# Altium PCB EPS_V1.PcbDoc
Units mil, origin at the board's own origin, x right, y up, seen from the top; angles counter-clockwise.
Board outline 3550 x 3775.2 mil, 2 copper layers (Top Layer, Bottom Layer), stack 61.756 mil thick; 16 components, 104 nets, 899 pads, 35 vias.
Unrouted connection lines stored in the file: 22.
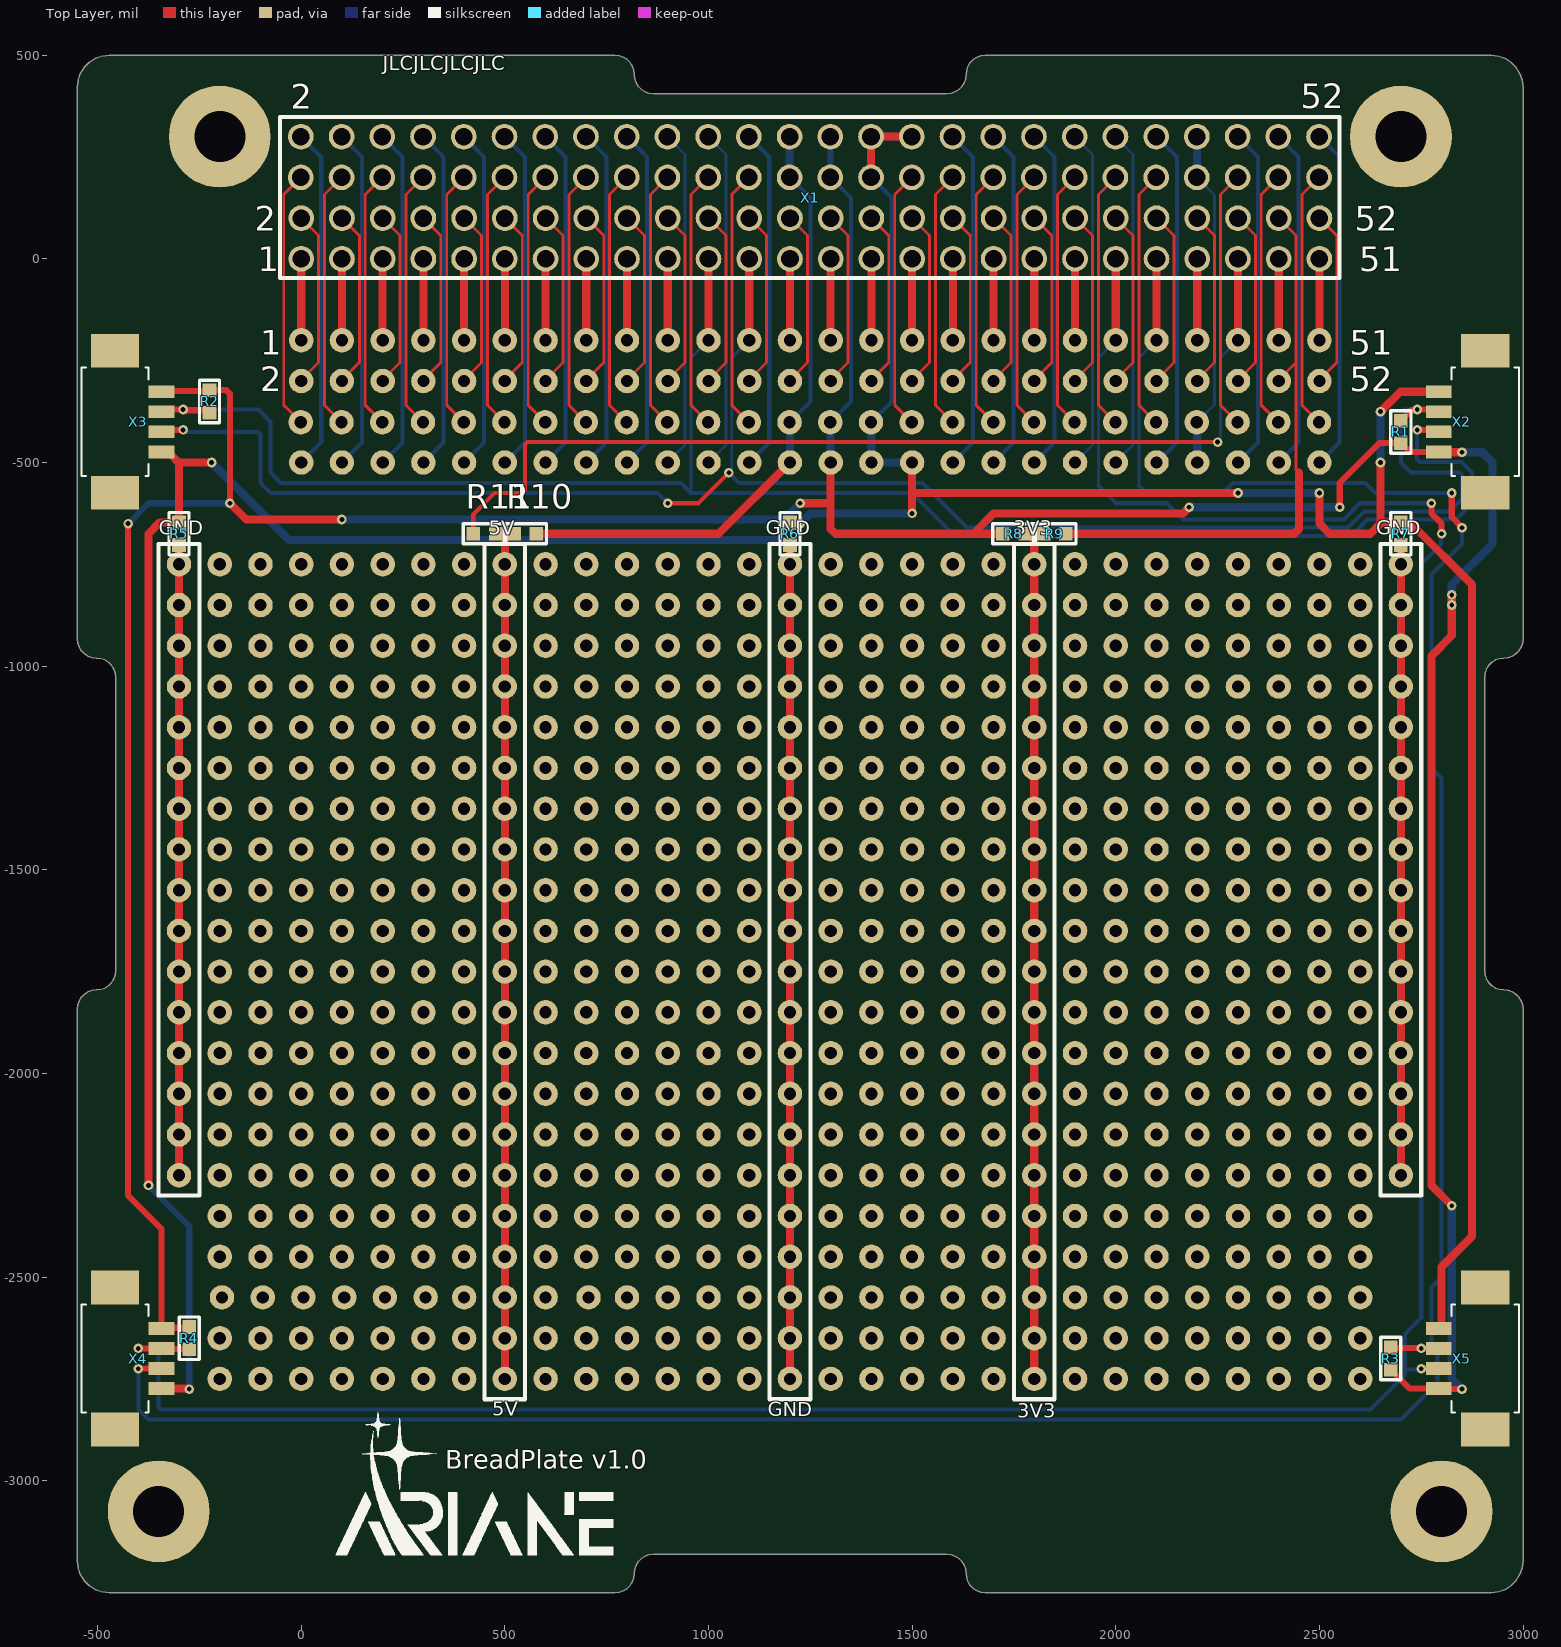
[diagram p0: Top Layer view]
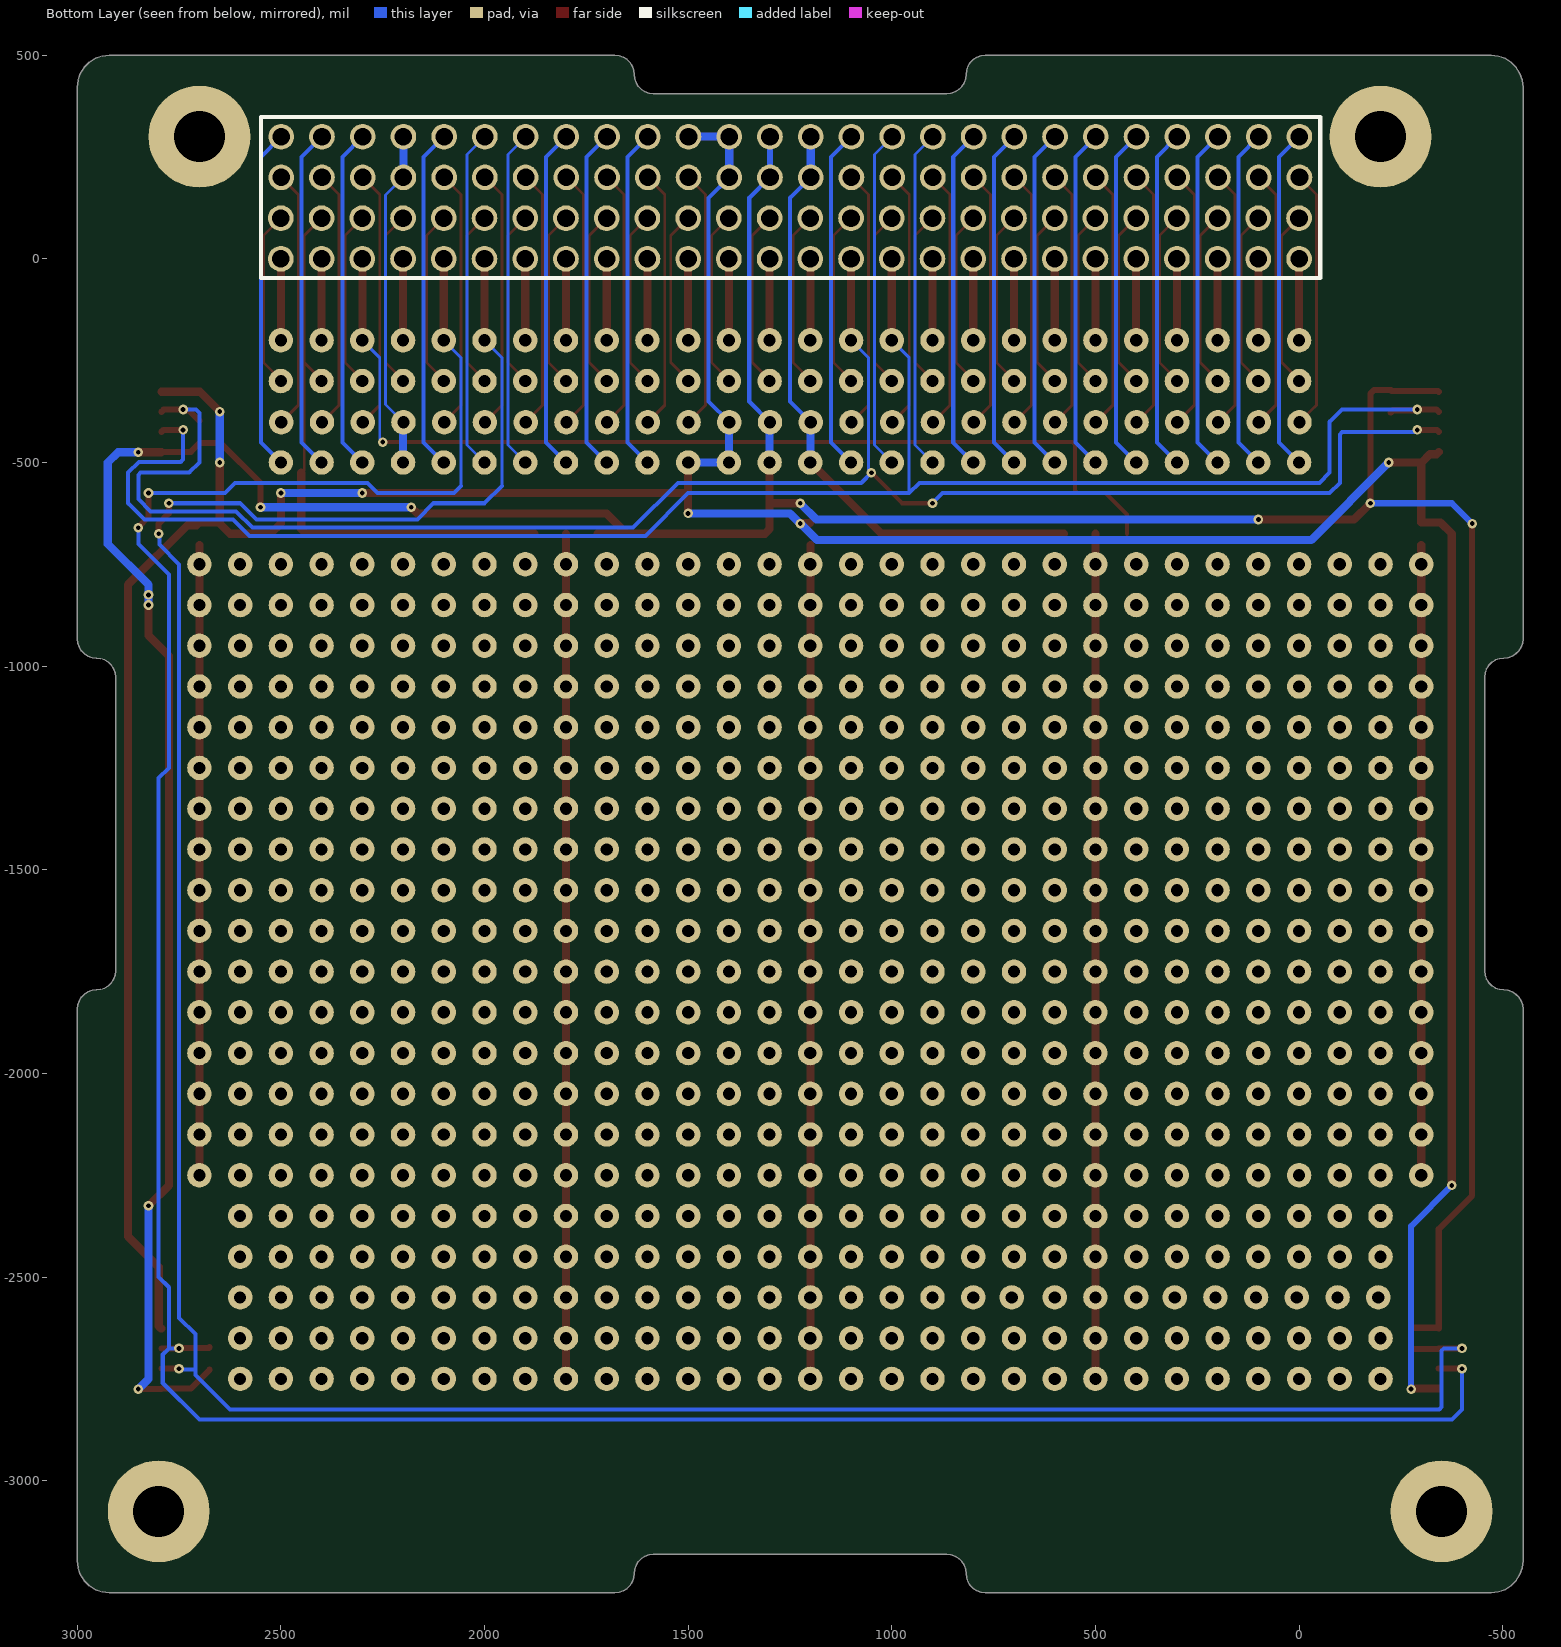
[diagram p1: Bottom Layer view, seen from below]

## Layer stack, top to bottom
Top Solder: solder mask 1, SM-001, Dk 4
Top Layer: signal copper 1.378
Dielectric 1: core 59, Core-043, Dk 4.3
Bottom Layer: signal copper 1.378
Bottom Solder: solder mask 1, SM-001, Dk 4

## Board outline
-549.96,-3196.44 -547.99,-3213.96 -542.17,-3230.6 -532.78,-3245.53 -520.32,-3258 -505.39,-3267.38 -488.74,-3273.21 -471.22,-3275.18 770.31,-3275.18 780.83,-3274 790.81,-3270.5 799.77,-3264.87 807.25,-3257.39 812.88,-3248.43 816.37,-3238.45 817.56,-3227.94 818.74,-3217.42 822.24,-3207.44 827.86,-3198.48 835.34,-3191 844.3,-3185.37 854.29,-3181.88 864.8,-3180.69 1585.27,-3180.69 1595.79,-3181.88 1605.77,-3185.37 1614.73,-3191 1622.21,-3198.48 1627.84,-3207.44 1631.33,-3217.42 1632.52,-3227.94 1633.7,-3238.45 1637.2,-3248.43 1642.82,-3257.39 1650.31,-3264.87 1659.26,-3270.5 1669.25,-3274 1679.76,-3275.18 2921.3,-3275.18 2938.82,-3273.21 2955.46,-3267.38 2970.39,-3258 2982.86,-3245.53 2992.24,-3230.6 2998.06,-3213.96 3000.04,-3196.44 3000.04,-1842.31 2998.85,-1831.79 2995.36,-1821.81 2989.73,-1812.85 2982.25,-1805.37 2973.29,-1799.74 2963.31,-1796.25 2952.79,-1795.06 2942.28,-1793.88 2932.29,-1790.38 2923.34,-1784.76 2915.86,-1777.27 2910.23,-1768.32 2906.73,-1758.33 2905.55,-1747.82 2905.55,-1027.35 2906.73,-1016.83 2910.23,-1006.85 2915.86,-997.89 2923.34,-990.41 2932.29,-984.78 2942.28,-981.29 2952.79,-980.1 2963.31,-978.92 2973.29,-975.42 2982.25,-969.79 2989.73,-962.31 2995.36,-953.36 2998.85,-943.37 3000.04,-932.86 3000.04,421.28 2998.06,438.8 2992.24,455.44 2982.86,470.37 2970.39,482.84 2955.46,492.22 2938.82,498.04 2921.3,500.02 1679.76,500.02 1669.25,498.83 1659.26,495.34 1650.31,489.71 1642.82,482.23 1637.2,473.27 1633.7,463.29 1632.52,452.77 1631.33,442.26 1627.84,432.27 1622.21,423.32 1614.73,415.84 1605.77,410.21 1595.79,406.71 1585.27,405.53 864.8,405.53 854.29,406.71 844.3,410.21 835.34,415.84 827.86,423.32 822.24,432.27 818.74,442.26 817.56,452.77 816.37,463.29 812.88,473.27 807.25,482.23 799.77,489.71 790.81,495.34 780.83,498.83 770.31,500.02 -471.22,500.02 -488.74,498.04 -505.39,492.22 -520.32,482.84 -532.78,470.37 -542.17,455.44 -547.99,438.8 -549.96,421.28 -549.96,-932.86 -548.78,-943.37 -545.28,-953.36 -539.66,-962.31 -532.17,-969.79 -523.22,-975.42 -513.23,-978.92 -502.72,-980.1 -492.21,-981.29 -482.22,-984.78 -473.26,-990.41 -465.78,-997.89 -460.15,-1006.85 -456.66,-1016.83 -455.47,-1027.35 -455.47,-1747.82 -456.66,-1758.33 -460.15,-1768.32 -465.78,-1777.27 -473.26,-1784.76 -482.22,-1790.38 -492.21,-1793.88 -502.72,-1795.06 -513.23,-1796.25 -523.22,-1799.74 -532.17,-1805.37 -539.66,-1812.85 -545.28,-1821.81 -548.78,-1831.79 -549.96,-1842.31

## Design rules (kind name [scope] priority, off if disabled: settings)
BoardOutlineClearance [All] p1: gap=11.81 ignorepadtopadclearanceinfootprint=FALSE
Clearance [All] p1: gap=5 ignorepadtopadclearanceinfootprint=FALSE
ComponentClearance [All] p1: gap=19.68 collisioncheckmode=3 verticalgap=19.68 showdistances=FALSE
DiffPairsRouting [All] p1: maxlimit=11.81 minlimit=3.94 mostfreqgap=5.91 toplayer_minwidth=3.94 toplayer_maxwidth=11.81 toplayer_prefwidth=5.91 bottomlayer_minwidth=3.94 bottomlayer_maxwidth=11.81 bottomlayer_prefwidth=5.91 maxuncoupledlength=500
Height [All] p1: minheight=0 maxheight=1968.5 prefheight=500
HoleSize [All] p1: absolutevalues=TRUE maxlimit=393.7 minlimit=7.87 maxpercent=80.000 minpercent=20.000
HoleToHoleClearance [All] p1: gap=7.87 allowstackedmicrovias=TRUE
MinimumSolderMaskSliver [All] p1: minsoldermaskwidth=7.87
PlaneClearance [All] p1: clearance=19.68
PlaneConnect [All] p1: planeconnectstyle=Direct reliefexpansion=19.68 reliefentries=4 reliefconductorwidth=7.87 reliefairgap=7.87
PolygonConnect [All] p1: connectstyle=Direct reliefconductorwidth=7.87 reliefentries=4 polygonreliefangle="90 Angle" airgapwidth=7.87
RoutingVias [All] p1: holewidth=7.87 width=17.72 viastyle="Through Hole" minholewidth=7.87 minwidth=17.72 maxholewidth=98.43 maxwidth=196.85
SilkToSolderMaskClearance [IsPad] p1: minsilkscreentomaskgap=7.87 clearancetoexposedcopper=TRUE
SolderMaskExpansion [All] p1: expansion=2.95 istentingtop=FALSE
Width [All] p1: maxlimit=100 minlimit=3.5 preferedwidth=5
21 further rules are at their usual default settings.

## Components (designator, comment, footprint, x,y, rotation, side; value= is the part's Value field where it differs from the comment)
R1 "RES 0603 *" "RES 0603" 2700,-425 r270 top
R2 "RES 0603 *" "RES 0603" -225,-350 r270 top
R3 "RES 0603 *" "RES 0603" 2675,-2700 r90 top
R4 "RES 0603 *" "RES 0603" -275,-2650 r270 top
R5 "RES 0603 0" "RES 0603" -300,-675 r270 top value=0
R6 "RES 0603 0" "RES 0603" 1200,-675 r270 top value=0
R7 "RES 0603 0" "RES 0603" 2700,-675 r270 top value=0
R8 "RES 0603 0" "RES 0603" 1750,-675 r0 top value=0
R9 "RES 0603 0" "RES 0603" 1850,-675 r180 top value=0
R10 "RES 0603 0" "RES 0603" 550,-675 r180 top value=0
R11 "RES 0603 0" "RES 0603" 450,-675 r0 top value=0
X1 "PC104" PC104_ArianSpace -199.96,300.02 r0 top
X2 "Header?" PicoBlade_4P 2850,-400 r90 top
X3 "Header?" PicoBlade_4P -400,-400 r270 top
X4 "Header?" PicoBlade_4P -400,-2700 r270 top
X5 "Header?" PicoBlade_4P 2850,-2700 r90 top

## Footprints (in the part's own frame and the unit in brackets; to place one, negate y for a bottom-side part, rotate by r counter-clockwise, add the part's x,y. Pads: shape width x height; smd on the part's side, far side on the other; paste and mask are expansions set on the pad)
PC104_ArianSpace [mm]
  round 1.6 hole 1.1 mask+0: 1(5.079,-7.62) 2(5.08,-5.08) 3(7.619,-7.62) 4(7.62,-5.08) 5(10.159,-7.62) 6(10.16,-5.08) 7(12.699,-7.62) 8(12.7,-5.08) 9(15.239,-7.62) 10(15.24,-5.08) 11(17.779,-7.62) 12(17.78,-5.08) 13(20.319,-7.62) 14(20.32,-5.08) 15(22.859,-7.62) 16(22.86,-5.08) 17(25.399,-7.62) 18(25.4,-5.08) 19(27.939,-7.62) 20(27.94,-5.08) 21(30.479,-7.62) 22(30.48,-5.08) 23(33.019,-7.62) 24(33.02,-5.08) 25(35.559,-7.62) 26(35.56,-5.08) 27(38.099,-7.62) 28(38.1,-5.08) 29(40.639,-7.62) 30(40.64,-5.08) 31(43.179,-7.62) 32(43.18,-5.08) 33(45.719,-7.62) 34(45.72,-5.08) 35(48.259,-7.62) 36(48.26,-5.08) 37(50.799,-7.62) 38(50.8,-5.08) 39(53.339,-7.62) 40(53.34,-5.08) 41(55.879,-7.62) 42(55.88,-5.08) 43(58.419,-7.62) 44(58.42,-5.08) 45(60.959,-7.62) 46(60.96,-5.08) 47(63.499,-7.62) 48(63.5,-5.08) 49(66.039,-7.62) 50(66.04,-5.08) 51(68.579,-7.62) 52(68.58,-5.08) 53(5.057,-2.54) 54(5.058,0) 55(7.597,-2.54) 56(7.598,0) 57(10.137,-2.54) 58(10.138,0) 59(12.677,-2.54) 60(12.678,0) 61(15.217,-2.54) 62(15.218,0) 63(17.757,-2.54) 64(17.758,0) 65(20.297,-2.54) 66(20.298,0) 67(22.837,-2.54) 68(22.838,0) 69(25.377,-2.54) 70(25.378,0) 71(27.917,-2.54) 72(27.918,0) 73(30.457,-2.54) 74(30.458,0) 75(32.997,-2.54) 76(32.998,0) 77(35.537,-2.54) 78(35.538,0) 79(38.077,-2.54) 80(38.078,0) 81(40.617,-2.54) 82(40.618,0) 83(43.157,-2.54) 84(43.158,0) 85(45.697,-2.54) 86(45.698,0) 87(48.237,-2.54) 88(48.238,0) 89(50.777,-2.54) 90(50.778,0) 91(53.317,-2.54) 92(53.318,0) 93(55.857,-2.54) 94(55.858,0) 95(58.397,-2.54) 96(58.398,0) 97(60.937,-2.54) 98(60.938,0) 99(63.477,-2.54) 100(63.478,0) 101(66.017,-2.54) 102(66.018,0) 103(68.557,-2.54) 104(68.558,0)
  silkscreen extent 3.76,-8.81 69.82,1.22, body extent 3.76,-8.84 69.8,1.32, height 11.68
PicoBlade_4P [mm]
  rect 0.8x1.6 smd: 1(-1.875,1.45) 2(-0.625,1.45) 3(0.625,1.45) 4(1.875,1.45)
  rect 2.1x3 smd: S1(-4.425,-1.45) S2(4.425,-1.45)
  silkscreen extent -3.37,-3.55 3.38,0.65, body extent -5.04,-2.46 5.11,1.74, height 4.77
"RES 0603" [mm]
  rect 0.85x0.85 smd: 1(-0.7,0) 2(0.7,0)
  silkscreen extent -1.33,-0.63 1.33,0.63, body extent -0.8,-0.4 0.8,0.4, height 0.44

## Part data
R1 R2 R3 R4 R5 R6 R7 R8 R9 R10 R11: library part !Resistor, "Resistor", IsSMT=NoSMT
X1: library part PC104_ArianSpace, "PC104 connector"
X2 X3 X4 X5: library part "Header 1x4", "4x1 header", IsSMT=NoSMT, Purpose="I2C Header"

## Free pads (board coordinates)
  round 250 hole 125.2: 1(-349.96,-3075.18) 1(-199.96,300.02) 1(2700.04,300.02) 1(2800.04,-3075.18)
  round 60 hole 30: 2(-300,-2250) 2(-300,-2150) 2(-300,-2050) 2(-300,-1950) 2(-300,-1850) 2(-300,-1750) 2(-300,-1650) 2(-300,-1550) 2(-300,-1450) 2(-300,-1350) 2(-300,-1250) 2(-300,-1150) 2(-300,-1050) 2(-300,-950) 2(-300,-850) 2(-300,-750) 2(-200,-2750) 2(-200,-2650) 2(-200,-2450) 2(-200,-2350) 2(-200,-2250) 2(-200,-2150) 2(-200,-2050) 2(-200,-1950) 2(-200,-1850) 2(-200,-1750) 2(-200,-1650) 2(-200,-1550) 2(-200,-1450) 2(-200,-1350) 2(-200,-1250) 2(-200,-1150) 2(-200,-1050) 2(-200,-950) 2(-200,-850) 2(-200,-750) 2(-194.52,-2550) 2(-100,-2750) 2(-100,-2650) 2(-100,-2450) 2(-100,-2350) 2(-100,-2250) 2(-100,-2150) 2(-100,-2050) 2(-100,-1950) 2(-100,-1850) 2(-100,-1750) 2(-100,-1650) 2(-100,-1550) 2(-100,-1450) 2(-100,-1350) 2(-100,-1250) 2(-100,-1150) 2(-100,-1050) 2(-100,-950) 2(-100,-850) 2(-100,-750) 2(-94.52,-2550) 2(0,-2750) 2(0,-2650) 2(0,-2450) 2(0,-2350) 2(0,-2250) 2(0,-2150) 2(0,-2050) 2(0,-1950) 2(0,-1850) 2(0,-1750) 2(0,-1650) 2(0,-1550) 2(0,-1450) 2(0,-1350) 2(0,-1250) 2(0,-1150) 2(0,-1050) 2(0,-950) 2(0,-850) 2(0,-750) 2(5.48,-2550) 2(100,-2750) 2(100,-2650) 2(100,-2450) 2(100,-2350) 2(100,-2250) 2(100,-2150) 2(100,-2050) 2(100,-1950) 2(100,-1850) 2(100,-1750) 2(100,-1650) 2(100,-1550) 2(100,-1450) 2(100,-1350) 2(100,-1250) 2(100,-1150) 2(100,-1050) 2(100,-950) 2(100,-850) 2(100,-750) 2(105.48,-2550) 2(200,-2750) 2(200,-2650) 2(200,-2450) 2(200,-2350) 2(200,-2250) 2(200,-2150) 2(200,-2050) 2(200,-1950) 2(200,-1850) 2(200,-1750) 2(200,-1650) 2(200,-1550) 2(200,-1450) 2(200,-1350) 2(200,-1250) 2(200,-1150) 2(200,-1050) 2(200,-950) 2(200,-850) 2(200,-750) 2(205.48,-2550) 2(300,-2750) 2(300,-2650) 2(300,-2450) 2(300,-2350) 2(300,-2250) 2(300,-2150) 2(300,-2050) 2(300,-1950) 2(300,-1850) 2(300,-1750) 2(300,-1650) 2(300,-1550) 2(300,-1450) 2(300,-1350) 2(300,-1250) 2(300,-1150) 2(300,-1050) 2(300,-950) 2(300,-850) 2(300,-750) 2(305.48,-2550) 2(400,-2750) 2(400,-2650) 2(400,-2550) 2(400,-2450) 2(400,-2350) 2(400,-2250) 2(400,-2150) 2(400,-2050) 2(400,-1950) 2(400,-1850) 2(400,-1750) 2(400,-1650) 2(400,-1550) 2(400,-1450) 2(400,-1350) 2(400,-1250) 2(400,-1150) 2(400,-1050) 2(400,-950) 2(400,-850) 2(400,-750) 2(500,-2750) 2(500,-2650) 2(500,-2550) 2(500,-2450) 2(500,-2350) 2(500,-2250) 2(500,-2150) 2(500,-2050) 2(500,-1950) 2(500,-1850) 2(500,-1750) 2(500,-1650) 2(500,-1550) 2(500,-1450) 2(500,-1350) 2(500,-1250) 2(500,-1150) 2(500,-1050) 2(500,-950) 2(500,-850) 2(500,-750) 2(600,-2750) 2(600,-2650) 2(600,-2550) 2(600,-2450) 2(600,-2350) 2(600,-2250) 2(600,-2150) 2(600,-2050) 2(600,-1950) 2(600,-1850) 2(600,-1750) 2(600,-1650) 2(600,-1550) 2(600,-1450) 2(600,-1350) 2(600,-1250) 2(600,-1150) 2(600,-1050) 2(600,-950) 2(600,-850) 2(600,-750) 2(700,-2750) 2(700,-2650) 2(700,-2450) 2(700,-2350) 2(700,-2250) 2(700,-2150) 2(700,-2050) 2(700,-1950) 2(700,-1850) 2(700,-1750) 2(700,-1650) 2(700,-1550) 2(700,-1450) 2(700,-1350) 2(700,-1250) 2(700,-1150) 2(700,-1050) 2(700,-950) 2(700,-850) 2(700,-750) 2(705.48,-2550) 2(800,-2750) 2(800,-2650) 2(800,-2550) 2(800,-2450) 2(800,-2350) 2(800,-2250) 2(800,-2150) 2(800,-2050) 2(800,-1950) 2(800,-1850) 2(800,-1750) 2(800,-1650) 2(800,-1550) 2(800,-1450) 2(800,-1350) 2(800,-1250) 2(800,-1150) 2(800,-1050) 2(800,-950) 2(800,-850) 2(800,-750) 2(900,-2750) 2(900,-2650) 2(900,-2550) 2(900,-2450) 2(900,-2350) 2(900,-2250) 2(900,-2150) 2(900,-2050) 2(900,-1950) 2(900,-1850) 2(900,-1750) 2(900,-1650) 2(900,-1550) 2(900,-1450) 2(900,-1350) 2(900,-1250) 2(900,-1150) 2(900,-1050) 2(900,-950) 2(900,-850) 2(900,-750) 2(1000,-2750) 2(1000,-2650) 2(1000,-2550) 2(1000,-2450) 2(1000,-2350) 2(1000,-2250) 2(1000,-2150) 2(1000,-2050) 2(1000,-1950) 2(1000,-1850) 2(1000,-1750) 2(1000,-1650) 2(1000,-1550) 2(1000,-1450) 2(1000,-1350) 2(1000,-1250) 2(1000,-1150) 2(1000,-1050) 2(1000,-950) 2(1000,-850) 2(1000,-750) 2(1100,-2750) 2(1100,-2650) 2(1100,-2550) 2(1100,-2450) 2(1100,-2350) 2(1100,-2250) 2(1100,-2150) 2(1100,-2050) 2(1100,-1950) 2(1100,-1850) 2(1100,-1750) 2(1100,-1650) 2(1100,-1550) 2(1100,-1450) 2(1100,-1350) 2(1100,-1250) 2(1100,-1150) 2(1100,-1050) 2(1100,-950) 2(1100,-850) 2(1100,-750) 2(1200,-2750) 2(1200,-2650) 2(1200,-2550) 2(1200,-2450) 2(1200,-2350) 2(1200,-2250) 2(1200,-2150) 2(1200,-2050) 2(1200,-1950) 2(1200,-1850) 2(1200,-1750) 2(1200,-1650) 2(1200,-1550) 2(1200,-1450) 2(1200,-1350) 2(1200,-1250) 2(1200,-1150) 2(1200,-1050) 2(1200,-950) 2(1200,-850) 2(1200,-750) 2(1300,-2750) 2(1300,-2650) 2(1300,-2550) 2(1300,-2450) 2(1300,-2350) 2(1300,-2250) 2(1300,-2150) 2(1300,-2050) 2(1300,-1950) 2(1300,-1850) 2(1300,-1750) 2(1300,-1650) 2(1300,-1550) 2(1300,-1450) 2(1300,-1350) 2(1300,-1250) 2(1300,-1150) 2(1300,-1050) 2(1300,-950) 2(1300,-850) 2(1300,-750) 2(1400,-2750) 2(1400,-2650) 2(1400,-2550) 2(1400,-2450) 2(1400,-2350) 2(1400,-2250) 2(1400,-2150) 2(1400,-2050) 2(1400,-1950) 2(1400,-1850) 2(1400,-1750) 2(1400,-1650) 2(1400,-1550) 2(1400,-1450) 2(1400,-1350) 2(1400,-1250) 2(1400,-1150) 2(1400,-1050) 2(1400,-950) 2(1400,-850) 2(1400,-750) 2(1500,-2750) 2(1500,-2650) 2(1500,-2550) 2(1500,-2450) 2(1500,-2350) 2(1500,-2250) 2(1500,-2150) 2(1500,-2050) 2(1500,-1950) 2(1500,-1850) 2(1500,-1750) 2(1500,-1650) 2(1500,-1550) 2(1500,-1450) 2(1500,-1350) 2(1500,-1250) 2(1500,-1150) 2(1500,-1050) 2(1500,-950) 2(1500,-850) 2(1500,-750) 2(1600,-2750) 2(1600,-2650) 2(1600,-2550) 2(1600,-2450) 2(1600,-2350) 2(1600,-2250) 2(1600,-2150) 2(1600,-2050) 2(1600,-1950) 2(1600,-1850) 2(1600,-1750) 2(1600,-1650) 2(1600,-1550) 2(1600,-1450) 2(1600,-1350) 2(1600,-1250) 2(1600,-1150) 2(1600,-1050) 2(1600,-950) 2(1600,-850) 2(1600,-750) 2(1700,-2750) 2(1700,-2650) 2(1700,-2550) 2(1700,-2450) 2(1700,-2350) 2(1700,-2250) 2(1700,-2150) 2(1700,-2050) 2(1700,-1950) 2(1700,-1850) 2(1700,-1750) 2(1700,-1650) 2(1700,-1550) 2(1700,-1450) 2(1700,-1350) 2(1700,-1250) 2(1700,-1150) 2(1700,-1050) 2(1700,-950) 2(1700,-850) 2(1700,-750) 2(1800,-2750) 2(1800,-2650) 2(1800,-2550) 2(1800,-2450) 2(1800,-2350) 2(1800,-2250) 2(1800,-2150) 2(1800,-2050) 2(1800,-1950) 2(1800,-1850) 2(1800,-1750) 2(1800,-1650) 2(1800,-1550) 2(1800,-1450) 2(1800,-1350) 2(1800,-1250) 2(1800,-1150) 2(1800,-1050) 2(1800,-950) 2(1800,-850) 2(1800,-750) 2(1900,-2750) 2(1900,-2650) 2(1900,-2550) 2(1900,-2450) 2(1900,-2350) 2(1900,-2250) 2(1900,-2150) 2(1900,-2050) 2(1900,-1950) 2(1900,-1850) 2(1900,-1750) 2(1900,-1650) 2(1900,-1550) 2(1900,-1450) 2(1900,-1350) 2(1900,-1250) 2(1900,-1150) 2(1900,-1050) 2(1900,-950) 2(1900,-850) 2(1900,-750) 2(2000,-2750) 2(2000,-2650) 2(2000,-2550) 2(2000,-2450) 2(2000,-2350) 2(2000,-2250) 2(2000,-2150) 2(2000,-2050) 2(2000,-1950) 2(2000,-1850) 2(2000,-1750) 2(2000,-1650) 2(2000,-1550) 2(2000,-1450) 2(2000,-1350) 2(2000,-1250) 2(2000,-1150) 2(2000,-1050) 2(2000,-950) 2(2000,-850) 2(2000,-750) 2(2100,-2750) 2(2100,-2650) 2(2100,-2550) 2(2100,-2450) 2(2100,-2350) 2(2100,-2250) 2(2100,-2150) 2(2100,-2050) 2(2100,-1950) 2(2100,-1850) 2(2100,-1750) 2(2100,-1650) 2(2100,-1550) 2(2100,-1450) 2(2100,-1350) 2(2100,-1250) 2(2100,-1150) 2(2100,-1050) 2(2100,-950) 2(2100,-850) 2(2100,-750) 2(2200,-2750) 2(2200,-2650) 2(2200,-2550) 2(2200,-2450) 2(2200,-2350) 2(2200,-2250) 2(2200,-2150) 2(2200,-2050) 2(2200,-1950) 2(2200,-1850) 2(2200,-1750) 2(2200,-1650) 2(2200,-1550) 2(2200,-1450) 2(2200,-1350) 2(2200,-1250) 2(2200,-1150) 2(2200,-1050) 2(2200,-950) 2(2200,-850) 2(2200,-750) 2(2300,-2750) 2(2300,-2650) 2(2300,-2550) 2(2300,-2450) 2(2300,-2350) 2(2300,-2250) 2(2300,-2150) 2(2300,-2050) 2(2300,-1950) 2(2300,-1850) 2(2300,-1750) 2(2300,-1650) 2(2300,-1550) 2(2300,-1450) 2(2300,-1350) 2(2300,-1250) 2(2300,-1150) 2(2300,-1050) 2(2300,-950) 2(2300,-850) 2(2300,-750) 2(2400,-2750) 2(2400,-2650) 2(2400,-2550) 2(2400,-2450) 2(2400,-2350) 2(2400,-2250) 2(2400,-2150) 2(2400,-2050) 2(2400,-1950) 2(2400,-1850) 2(2400,-1750) 2(2400,-1650) 2(2400,-1550) 2(2400,-1450) 2(2400,-1350) 2(2400,-1250) 2(2400,-1150) 2(2400,-1050) 2(2400,-950) 2(2400,-850) 2(2400,-750) 2(2500,-2750) 2(2500,-2650) 2(2500,-2550) 2(2500,-2450) 2(2500,-2350) 2(2500,-2250) 2(2500,-2150) 2(2500,-2050) 2(2500,-1950) 2(2500,-1850) 2(2500,-1750) 2(2500,-1650) 2(2500,-1550) 2(2500,-1450) 2(2500,-1350) 2(2500,-1250) 2(2500,-1150) 2(2500,-1050) 2(2500,-950) 2(2500,-850) 2(2500,-750) 2(2600,-2750) 2(2600,-2650) 2(2600,-2550) 2(2600,-2450) 2(2600,-2350) 2(2600,-2250) 2(2600,-2150) 2(2600,-2050) 2(2600,-1950) 2(2600,-1850) 2(2600,-1750) 2(2600,-1650) 2(2600,-1550) 2(2600,-1450) 2(2600,-1350) 2(2600,-1250) 2(2600,-1150) 2(2600,-1050) 2(2600,-950) 2(2600,-850) 2(2600,-750) 2(2700,-2250) 2(2700,-2150) 2(2700,-2050) 2(2700,-1950) 2(2700,-1850) 2(2700,-1750) 2(2700,-1650) 2(2700,-1550) 2(2700,-1450) 2(2700,-1350) 2(2700,-1250) 2(2700,-1150) 2(2700,-1050) 2(2700,-950) 2(2700,-850) 2(2700,-750) 3(0,-199.98) 3(100,-199.98) 3(200,-199.98) 3(300,-199.98) 3(400,-199.98) 3(500,-199.98) 3(600,-199.98) 3(700,-199.98) 3(800,-199.98) 3(900,-199.98) 3(1000,-199.98) 3(1100,-199.98) 3(1200,-199.98) 3(1300,-199.98) 3(1400,-199.98) 3(1500,-199.98) 3(1600,-199.98) 3(1700,-199.98) 3(1800,-199.98) 3(1900,-199.98) 3(2000,-199.98) 3(2100,-199.98) 3(2200,-199.98) 3(2300,-199.98) 3(2400,-199.98) 3(2500,-199.98) 4(0,-299.98) 4(100,-299.98) 4(200,-299.98) 4(300,-299.98) 4(400,-299.98) 4(500,-299.98) 4(600,-299.98) 4(700,-299.98) 4(800,-299.98) 4(900,-299.98) 4(1000,-299.98) 4(1100,-299.98) 4(1200,-299.98) 4(1300,-299.98) 4(1400,-299.98) 4(1500,-299.98) 4(1600,-299.98) 4(1700,-299.98) 4(1800,-299.98) 4(1900,-299.98) 4(2000,-299.98) 4(2100,-299.98) 4(2200,-299.98) 4(2300,-299.98) 4(2400,-299.98) 4(2500,-299.98) 5(-1,-400.97) 5(99,-400.97) 5(199,-400.97) 5(299,-400.97) 5(399,-400.97) 5(499,-400.97) 5(599,-400.97) 5(699,-400.97) 5(799,-400.97) 5(899,-400.97) 5(999,-400.97) 5(1099,-400.97) 5(1199,-400.97) 5(1299,-400.97) 5(1399,-400.97) 5(1499,-400.97) 5(1599,-400.97) 5(1699,-400.97) 5(1799,-400.97) 5(1899,-400.97) 5(1999,-400.97) 5(2099,-400.97) 5(2199,-400.97) 5(2299,-400.97) 5(2399,-400.97) 5(2499,-400.97) 6(0,-499.98) 6(100,-499.98) 6(200,-499.98) 6(300,-499.98) 6(400,-499.98) 6(500,-499.98) 6(600,-499.98) 6(700,-499.98) 6(800,-499.98) 6(900,-499.98) 6(1000,-499.98) 6(1100,-499.98) 6(1200,-499.98) 6(1300,-499.98) 6(1400,-499.98) 6(1500,-499.98) 6(1600,-499.98) 6(1700,-499.98) 6(1800,-499.98) 6(1900,-499.98) 6(2000,-499.98) 6(2100,-499.98) 6(2200,-499.98) 6(2300,-499.98) 6(2400,-499.98) 6(2500,-499.98)

## Via types
v1: diameter 23.62, hole 11.81, Top Layer to Bottom Layer, 35 vias

## Nets (pads, with @x,y where several pads share a name; then routed paths per layer and width w, separated by ;. In a path a pad name is that pad's centre, name@x,y a point inside that pad or via, vN(x,y) a via of type N, cw(c..) or ccw(c..) an arc to the next point about the centre after c; other vN are vias at no path point)
3V3_BREADBOARD: pad.2@1800,-750 pad.2@1800,-850 pad.2@1800,-950 pad.2@1800,-1050 pad.2@1800,-1150 pad.2@1800,-1250 pad.2@1800,-1350 pad.2@1800,-1450 pad.2@1800,-1550 pad.2@1800,-1650 pad.2@1800,-1750 pad.2@1800,-1850 pad.2@1800,-1950 pad.2@1800,-2050 pad.2@1800,-2150 pad.2@1800,-2250 pad.2@1800,-2350 pad.2@1800,-2450 pad.2@1800,-2550 pad.2@1800,-2650 pad.2@1800,-2750 R8.2 R9.2 | length 2075
  Top Layer w20: pad.2@1800,-2750 1800,-2650 1800,-2450 1800,-2350 1800,-2250 1800,-2150 1800,-2050 1800,-1950 1800,-1850 1800,-1750 1800,-1650 1800,-1550 1800,-1450 1800,-1350 1800,-1250 1800,-1150 1800,-1050 1800,-950 1800,-850 1800,-750 1800,-675
3V3_MAIN: pad.5@1299,-400.97 pad.6@1300,-499.98 R1.2 R2.1 R3.1 R4.1 R8.1 X1.79 X1.80 X2.1 X3.1 X4.1 X5.1 | length 9746.1
  Top Layer w10: 2721.26,-473.82 2722.39,-474.95
  Top Layer w15: v1(-425,-650) -425,-2300 -342.91,-2382.09 X4.1 -341.04,-2624.31 -276.87,-2624.31 R4.1 ; X3.1 -341.04,-324.31 -226.87,-324.31 R2.1 -183.79,-322.44 -175,-331.23 v1(-175,-600) ; v1(2550,-610) 2550,-550 2647.44,-452.56 R1.2 2721.26,-473.82 X2.1 ; R3.1 2721.26,-2773.82 X5.1 2793.5,-2774.41 2849.41,-2774.41 v1(2850,-2775)
  Top Layer w20: v1(-175,-600) -135,-640 v1(100,-640) ; v1(1225,-600) 1300,-600 ; pad.6@1300,-499.98 1300,-663.28 1311.71,-675 1650,-675 ; R8.1 1650,-675 ; v1(2180,-610) 2165,-625 1700,-625 1650,-675 ; X2.1 2794.09,-475 v1(2850,-475) ; v1(2825,-2325) 2775,-2275 2775,-975 2825,-925 v1(2825,-850) v1(2825,-825)
  Bottom Layer w10: pad.5@1299.03,-400.97 1300,-400 1350,-350 1350,150 1299.98,200.02 X1.79
  Bottom Layer w15: v1(-425,-650) -375,-600 v1(-175,-600) ; X1.79 X1.80
  Bottom Layer w20: v1(100,-640) 1185,-640 v1(1225,-600) ; pad.6@1300,-500 pad.5@1300,-400 ; v1(2180,-610) v1(2550,-610) ; v1(2825,-2325) 2825,-2750 v1(2850,-2775) ; v1(2825,-850) v1(2825,-825) 2825,-800 2925,-700 2925,-500 2900,-475 v1(2850,-475)
5V_BREADBOARD: R10.2 R11.2 | length 2075
  Top Layer w20: 500,-2750 500,-675
5V_CHARGE_IN: pad.4@1500,-299.98 X1.32 | length 434.5
  Top Layer w7: pad.4@1498.5,-298.48 1542.72,-254.27 1542.72,57.34 X1.32
5V_MAIN: pad.2@500,-750 pad.2@500,-850 pad.2@500,-950 pad.2@500,-1050 pad.2@500,-1150 pad.2@500,-1250 pad.2@500,-1350 pad.2@500,-1450 pad.2@500,-1550 pad.2@500,-1650 pad.2@500,-1750 pad.2@500,-1850 pad.2@500,-1950 pad.2@500,-2050 pad.2@500,-2150 pad.2@500,-2250 pad.2@500,-2350 pad.2@500,-2450 pad.2@500,-2550 pad.2@500,-2650 pad.2@500,-2750 pad.5@1199,-400.97 pad.6@1200,-499.98 R10.1 X1.77 X1.78 | length 1538.7
  Top Layer w20: R10.1 1024.98,-675 pad.6@1200,-499.98
  Bottom Layer w10: pad.5@1199.03,-400.97 1200,-400 1250,-350 1250,150 1199.98,200.02 X1.77
  Bottom Layer w20: X1.77 X1.78 ; pad.6@1200,-500 pad.5@1200,-400
(A)GND: pad.5@1499,-400.97 X1.83 | length 635.6
  Top Layer w7: pad.5@1499,-400.98 1457.31,-359.3 1457.31,158.21 X1.83
ADDPWR1: pad.3@2300,-199.98 R11.1 X1.47 | length 2485.6
  Top Layer w10: R11.1 422.44,-627.56 475,-575 544.14,-575 550,-569.14 550,-455.86 555.86,-450 v1(2250,-450)
  Top Layer w20: pad.3@2300,-199.98 X1.47
  Bottom Layer w7: v1(2250,-450) 2257.32,-442.68 2257.32,-242.68 pad.3@2300,-200
ADDPWR2: pad.4@2300,-299.98 X1.48 | length 434.5
  Top Layer w7: pad.4@2298.5,-298.48 2342.72,-254.27 2342.72,57.34 X1.48
ADDPWR3: pad.3@2400,-199.98 X1.49 | length 200
  Top Layer w20: pad.3@2400,-199.98 X1.49
ADDPWR4: pad.4@2400,-299.98 R9.1 X1.50 | length 1398.8
  Top Layer w7: pad.4@2398.5,-298.48 2442.72,-254.27 ; X1.50 2442.72,57.34 2442.72,-254.27 ; 2450,-525 2442.72,-517.72 2442.72,-254.27
  Top Layer w20: R9.1 2438.28,-675 2450,-663.28 2450,-550
ADDPWR5: pad.3@2500,-199.98 X1.51 | length 200
  Top Layer w20: pad.3@2500,-199.98 X1.51
ADDPWR6: pad.4@2500,-299.98 X1.52 | length 434.5
  Top Layer w7: pad.4@2498.5,-298.48 2542.72,-254.27 2542.72,57.34 X1.52
CAN_A_H: pad.3@100,-199.98 X1.3 | length 200
  Top Layer w20: pad.3@100,-199.98 X1.3
CAN_A_L: pad.3@0,-199.98 X1.1 | length 200
  Top Layer w20: pad.3@0,-199.98 X1.1
CAN_B_H: pad.5@99,-400.97 X1.55 | length 635.6
  Top Layer w7: pad.5@99,-400.98 57.31,-359.3 57.31,158.21 X1.55
CAN_B_L: pad.5@-1,-400.97 X1.53 | length 635.6
  Top Layer w7: pad.5@-1,-400.97 -30.5,-371.48 -42.69,-359.3 -42.69,158.21 X1.53
CPU_RX0: pad.4@800,-299.98 X1.18 | length 434.5
  Top Layer w7: pad.4@798.5,-298.48 842.72,-254.27 842.72,57.34 X1.18
CPU_RX1: pad.4@900,-299.98 X1.20 | length 434.5
  Top Layer w7: pad.4@898.5,-298.48 942.72,-254.27 942.72,57.34 X1.20
CPU_RX2: pad.4@1900,-299.98 X1.40 | length 434.5
  Top Layer w7: pad.4@1898.5,-298.48 1942.72,-254.27 1942.72,57.34 X1.40
CPU_RX3: pad.6@1000,-499.98 X1.74 | length 835.8
  Bottom Layer w7: X1.74 1042.76,256.42 1042.76,-457.22 pad.6@1000,-499.98
CPU_TX0: pad.3@800,-199.98 X1.17 | length 200
  Top Layer w20: pad.3@800,-199.98 X1.17
CPU_TX1: pad.3@900,-199.98 X1.19 | length 200
  Top Layer w20: pad.3@900,-199.98 X1.19
CPU_TX2: pad.3@1900,-199.98 X1.39 | length 200
  Top Layer w20: pad.3@1900,-200 X1.39
CPU_TX3: pad.5@999,-400.97 X1.73 | length 635.6
  Top Layer w7: pad.5@999,-400.98 957.31,-359.3 957.31,158.21 X1.73
GND: pad.5@1399,-400.97 pad.6@1400,-499.98 pad.6@1500,-499.98 R5.1 R6.1 R7.1 X1.81 X1.82 X1.84 X2.4 X3.4 X4.4 X5.4 | length 9629.6
  Top Layer w20: v1(-375,-2275) -375,-675 -347.44,-647.44 R5.1 -300,-500.98 ; X4.4 -276.18,-2773.82 v1(-275,-2775) ; X3.4 -337.17,-479.57 -321.42,-479.57 -300,-500.98 ; v1(-220,-500) -299.02,-500 -300,-500.98 ; R6.1 1201.87,-649.31 1224.31,-649.31 v1(1225,-650) ; X1.81 X1.82 X1.84 ; v1(1500,-625) pad.6@1500,-499.98 ; 1500,-575 v1(2300,-575) ; v1(2500,-575) 2500,-650 2525,-675 2625,-675 2650,-650 2650,-647.44 ; v1(2650,-500) 2650,-647.44 ; v1(2650,-375) 2698.82,-326.18 X2.4 ; X5.4 2794.25,-2626.18 2800,-2620.43 2800,-2475 2875,-2400 2875,-800 2729.17,-654.17 2706.72,-654.17 R7.1 2650,-647.44
  Bottom Layer w10: pad.5@1399.03,-400.97 1450,-350 1450,149.14 X1.81
  Bottom Layer w15: v1(-375,-2275) -275,-2375 v1(-275,-2775)
  Bottom Layer w20: v1(-220,-500) -30,-690 1184.02,-690 1224.02,-650 v1(1225,-650) 1250,-625 v1(1500,-625) ; pad.5@1399,-400.97 1399.5,-401.47 1399.5,-499.48 1400,-499.98 pad.6@1500,-499.98 ; X1.81 X1.82 X1.84 ; v1(2300,-575) v1(2500,-575) ; v1(2650,-500) v1(2650,-375)
GND1: pad.2@-300,-750 pad.2@-300,-850 pad.2@-300,-950 pad.2@-300,-1050 pad.2@-300,-1150 pad.2@-300,-1250 pad.2@-300,-1350 pad.2@-300,-1450 pad.2@-300,-1550 pad.2@-300,-1650 pad.2@-300,-1750 pad.2@-300,-1850 pad.2@-300,-1950 pad.2@-300,-2050 pad.2@-300,-2150 pad.2@-300,-2250 R5.2 | length 1547.4
  Top Layer w20: pad.2@-300,-2250 -300,-2150 -300,-2050 -300,-1950 -300,-1850 -300,-1750 -300,-1650 -300,-1550 -300,-1450 -300,-1350 -300,-1250 -300,-1150 -300,-1050 -300,-950 -300,-850 -300,-750 R5.2
GND2: pad.2@1200,-750 pad.2@1200,-850 pad.2@1200,-950 pad.2@1200,-1050 pad.2@1200,-1150 pad.2@1200,-1250 pad.2@1200,-1350 pad.2@1200,-1450 pad.2@1200,-1550 pad.2@1200,-1650 pad.2@1200,-1750 pad.2@1200,-1850 pad.2@1200,-1950 pad.2@1200,-2050 pad.2@1200,-2150 pad.2@1200,-2250 pad.2@1200,-2350 pad.2@1200,-2450 pad.2@1200,-2550 pad.2@1200,-2650 pad.2@1200,-2750 R6.2 | length 2047.4
  Top Layer w20: pad.2@1200,-2750 1200,-2650 1200,-2450 1200,-2350 1200,-2250 1200,-2150 1200,-2050 1200,-1950 1200,-1850 1200,-1750 1200,-1650 1200,-1550 1200,-1450 1200,-1350 1200,-1250 1200,-1150 1200,-1050 1200,-950 1200,-850 1200,-750 R6.2
GND3: pad.2@2700,-750 pad.2@2700,-850 pad.2@2700,-950 pad.2@2700,-1050 pad.2@2700,-1150 pad.2@2700,-1250 pad.2@2700,-1350 pad.2@2700,-1450 pad.2@2700,-1550 pad.2@2700,-1650 pad.2@2700,-1750 pad.2@2700,-1850 pad.2@2700,-1950 pad.2@2700,-2050 pad.2@2700,-2150 pad.2@2700,-2250 R7.2 | length 1547.4
  Top Layer w20: pad.2@2700,-2250 2700,-2150 2700,-2050 2700,-1950 2700,-1850 2700,-1750 2700,-1650 2700,-1550 2700,-1450 2700,-1350 2700,-1250 2700,-1150 2700,-1050 2700,-950 2700,-850 2700,-750 R7.2
GPIO2: pad.4@0,-299.98 X1.2 | length 434.5
  Top Layer w7: pad.4@-1.5,-298.48 42.72,-254.27 42.72,57.34 X1.2
GPIO4: pad.4@100,-299.98 X1.4 | length 434.5
  Top Layer w7: pad.4@98.5,-298.48 142.72,-254.27 142.72,57.34 X1.4
GPIO5: pad.3@200,-199.98 X1.5 | length 200
  Top Layer w20: pad.3@200,-199.98 X1.5
GPIO6: pad.4@200,-299.98 X1.6 | length 434.5
  Top Layer w7: pad.4@198.5,-298.48 242.72,-254.27 242.72,57.34 X1.6
GPIO7: pad.3@300,-199.98 X1.7 | length 200
  Top Layer w20: pad.3@300,-199.98 X1.7
GPIO8: pad.4@300,-299.98 X1.8 | length 434.5
  Top Layer w7: pad.4@298.5,-298.48 342.72,-254.27 342.72,57.34 X1.8
GPIO9: pad.3@400,-199.98 X1.9 | length 200
  Top Layer w20: pad.3@400,-199.98 X1.9
GPIO10: pad.4@400,-299.98 X1.10 | length 434.5
  Top Layer w7: pad.4@398.5,-298.48 442.72,-254.27 442.72,57.34 X1.10
GPIO11: pad.3@500,-199.98 X1.11 | length 200
  Top Layer w20: pad.3@500,-199.98 X1.11
GPIO12: pad.4@500,-299.98 X1.12 | length 434.5
  Top Layer w7: pad.4@498.5,-298.48 542.72,-254.27 542.72,57.34 X1.12
GPIO13: pad.3@600,-199.98 X1.13 | length 200
  Top Layer w20: pad.3@600,-199.98 X1.13
GPIO14: pad.4@600,-299.98 X1.14 | length 434.5
  Top Layer w7: pad.4@598.5,-298.48 642.72,-254.27 642.72,57.34 X1.14
GPIO15: pad.3@700,-199.98 X1.15 | length 200
  Top Layer w20: pad.3@700,-199.98 X1.15
GPIO16: pad.4@700,-299.98 X1.16 | length 434.5
  Top Layer w7: pad.4@698.5,-298.48 742.72,-254.27 742.72,57.34 X1.16
GPIO22: pad.4@1000,-299.98 X1.22 | length 434.5
  Top Layer w7: pad.4@998.5,-298.48 1042.72,-254.27 1042.72,57.34 X1.22
GPIO24: pad.4@1100,-299.98 X1.24 | length 434.5
  Top Layer w7: pad.4@1098.5,-298.48 1142.72,-254.27 1142.72,57.34 X1.24
GPIO25: pad.3@1200,-199.98 X1.25 | length 296.1
  Top Layer w20: X1.25@1191.5,-8.5 X1.25 ; pad.3@1200,-200 X1.25 ; 1200,-84.12 X1.25
GPIO26: pad.4@1200,-299.98 X1.26 | length 434.5
  Top Layer w7: pad.4@1198.5,-298.5 1242.72,-254.28 1242.72,57.32 X1.26
GPIO27: pad.3@1300,-199.98 X1.27 | length 200
  Top Layer w20: pad.3@1300,-200 X1.27
GPIO28: pad.4@1300,-299.98 X1.28 | length 434.5
  Top Layer w7: pad.4@1298.5,-298.48 1342.72,-254.27 1342.72,57.34 X1.28
GPIO29: pad.3@1400,-199.98 X1.29 | length 200
  Top Layer w20: pad.3@1400,-200 X1.29
GPIO30: pad.4@1400,-299.98 X1.30 | length 434.5
  Top Layer w7: pad.4@1398.5,-298.48 1442.72,-254.27 1442.72,57.34 X1.30
GPIO33: pad.3@1600,-199.98 X1.33 | length 200
  Top Layer w20: pad.3@1600,-200 X1.33
GPIO34: pad.4@1600,-299.98 X1.34 | length 434.5
  Top Layer w7: pad.4@1598.5,-298.48 1642.72,-254.27 1642.72,57.34 X1.34
GPIO35: pad.3@1700,-199.98 X1.35 | length 200
  Top Layer w20: pad.3@1700,-200 X1.35
GPIO36: pad.4@1700,-299.98 X1.36 | length 434.5
  Top Layer w7: pad.4@1698.5,-298.48 1742.72,-254.27 1742.72,57.34 X1.36
GPIO37: pad.3@1800,-199.98 X1.37 | length 200
  Top Layer w20: pad.3@1800,-200 X1.37
GPIO38: pad.4@1800,-299.98 X1.38 | length 434.5
  Top Layer w7: pad.4@1798.5,-298.48 1842.72,-254.27 1842.72,57.34 X1.38
GPIO54: pad.6@0,-499.98 X1.54 | length 841.1
  Bottom Layer w10: X1.54 49.16,250.02 49.16,-450.82 pad.6@0,-499.98
GPIO56: pad.6@100,-499.98 X1.56 | length 841.1
  Bottom Layer w10: X1.56 149.16,250.02 149.16,-450.82 pad.6@100,-499.98
GPIO57: pad.5@199,-400.97 X1.57 | length 635.6
  Top Layer w7: pad.5@199,-400.98 157.31,-359.3 157.31,158.21 X1.57
GPIO58: pad.6@200,-499.98 X1.58 | length 841.1
  Bottom Layer w10: X1.58 249.16,250.02 249.16,-450.82 pad.6@200,-499.98
GPIO59: pad.5@299,-400.97 X1.59 | length 635.6
  Top Layer w7: pad.5@299,-400.98 257.31,-359.3 257.31,158.21 X1.59
GPIO60: pad.6@300,-499.98 X1.60 | length 841.1
  Bottom Layer w10: X1.60 349.16,250.02 349.16,-450.82 pad.6@300,-499.98
GPIO61: pad.5@399,-400.97 X1.61 | length 635.6
  Top Layer w7: pad.5@399,-400.98 357.31,-359.3 357.31,158.21 X1.61
GPIO62: pad.6@400,-499.98 X1.62 | length 841.1
  Bottom Layer w10: X1.62 449.16,250.02 449.16,-450.82 pad.6@400,-499.98
GPIO63: pad.5@499,-400.97 X1.63 | length 635.6
  Top Layer w7: pad.5@499,-400.98 457.31,-359.3 457.31,158.21 X1.63
GPIO64: pad.6@500,-499.98 X1.64 | length 841.1
  Bottom Layer w10: X1.64 549.16,250.02 549.16,-450.82 pad.6@500,-499.98
GPIO65: pad.5@599,-400.97 X1.65 | length 635.6
  Top Layer w7: pad.5@599,-400.98 557.31,-359.3 557.31,158.21 X1.65
GPIO66: pad.6@600,-499.98 X1.66 | length 841.1
  Bottom Layer w10: X1.66 649.16,250.02 649.16,-450.82 pad.6@600,-499.98
GPIO67: pad.5@699,-400.97 X1.67 | length 635.6
  Top Layer w7: pad.5@699,-400.98 657.31,-359.3 657.31,158.21 X1.67
GPIO68: pad.6@700,-499.98 X1.68 | length 841.1
  Bottom Layer w10: X1.68 749.16,250.02 749.16,-450.82 pad.6@700,-499.98
GPIO69: pad.5@799,-400.97 X1.69 | length 635.6
  Top Layer w7: pad.5@799,-400.98 757.31,-359.3 757.31,158.21 X1.69
GPIO70: pad.6@800,-499.98 X1.70 | length 841.1
  Bottom Layer w10: X1.70 849.16,250.02 849.16,-450.82 pad.6@800,-499.98
GPIO71: pad.5@899,-400.97 X1.71 | length 635.6
  Top Layer w7: pad.5@899,-400.98 857.31,-359.3 857.31,158.21 X1.71
GPIO72: pad.6@900,-499.98 X1.72 | length 835.7
  Bottom Layer w7: X1.72 942.71,256.46 942.71,-457.27 pad.6@900,-499.98
GPIO75: pad.5@1099,-400.97 X1.75 | length 635.6
  Top Layer w7: pad.5@1099,-400.98 1057.31,-359.3 1057.31,158.21 X1.75
GPIO76: pad.6@1100,-499.98 X1.76 | length 841.1
  Bottom Layer w10: X1.76 1149.16,250.02 1149.16,-450.82 pad.6@1100,-499.98
GPIO85: pad.5@1599,-400.97 X1.85 | length 635.6
  Top Layer w7: pad.5@1599,-400.98 1557.31,-359.3 1557.31,158.21 X1.85
GPIO86: pad.6@1600,-499.98 X1.86 | length 841.1
  Bottom Layer w10: X1.86 1649.16,250 1649.16,-450.84 pad.6@1600,-500
GPIO87: pad.5@1699,-400.97 X1.87 | length 635.6
  Top Layer w7: pad.5@1699,-400.98 1657.31,-359.3 1657.31,158.21 X1.87
GPIO88: pad.6@1700,-499.98 X1.88 | length 841.1
  Bottom Layer w10: X1.88 1749.16,250 1749.16,-450.84 pad.6@1700,-500
GPIO89: pad.5@1799,-400.97 X1.89 | length 635.6
  Top Layer w7: pad.5@1799,-400.98 1757.31,-359.3 1757.31,158.21 X1.89
GPIO90: pad.6@1800,-499.98 X1.90 | length 841.1
  Bottom Layer w10: X1.90 1849.16,250 1849.16,-450.84 pad.6@1800,-500
GPIO91: pad.5@1899,-400.97 X1.91 | length 635.6
  Top Layer w7: pad.5@1899,-400.98 1857.31,-359.3 1857.31,158.21 X1.91
GPIO92: pad.6@1900,-499.98 X1.92 | length 835.7
  Bottom Layer w7: X1.92 1942.7,256.47 1942.7,-457.28 pad.6@1900,-499.98
GPIO93: pad.5@1999,-400.97 X1.93 | length 635.6
  Top Layer w7: pad.5@1999,-400.98 1957.31,-359.3 1957.31,158.21 X1.93
GPIO95: pad.5@2099,-400.97 X1.95 | length 635.6
  Top Layer w7: pad.5@2099,-400.98 2057.31,-359.3 2057.31,158.21 X1.95
GPIO96: pad.6@2100,-499.98 X1.96 | length 841.1
  Bottom Layer w10: X1.96@2100,300 2150,250 2150,-450.84 pad.6@2100.84,-500
I2C0_SCL: pad.3@1000,-199.98 R2.2 X1.21 X2.2 X3.2 | length 4466.7
  Top Layer w15: X3.2 -337.52,-370 v1(-290,-370) -288.35,-371.65 -230.91,-371.65 R2.2 ; v1(2740,-420) 2788.31,-420 X2.2
  Top Layer w20: pad.3@1000,-199.98 X1.21
  Bottom Layer w7: 957.33,-575 957.33,-242.67 pad.3@1000,-200
  Bottom Layer w10: v1(-290,-370) -105,-370 -75,-400 -75,-525 -50,-550 932.33,-550 957.33,-575 1500,-575 1605,-680 2577.5,-680 2617.5,-640 2835,-640 2875,-600 2875,-525 2848.75,-498.75 2745.86,-498.75 2740,-492.89 v1(2740,-420)
I2C0_SDA: pad.3@1100,-199.98 R1.1 X1.23 X2.3 X3.3 | length 4494.2
  Top Layer w10: v1(900,-600) 975,-600 v1(1050,-525)
  Top Layer w15: X3.3 -338.31,-420 v1(-290,-420) ; R1.1 2725.79,-371.65 2738.35,-371.65 v1(2740,-370) 2787.52,-370 X2.3
  Top Layer w20: pad.3@1100,-199.98 X1.23
  Bottom Layer w7: v1(1050,-525) 1057.29,-517.71 1057.29,-242.71 pad.3@1100,-200
  Bottom Layer w10: v1(-290,-420) -285,-425 -105.86,-425 -100,-430.86 -100,-550 -75,-575 875,-575 v1(900,-600) ; v1(1050,-525) 1075,-550 1525,-550 1635,-660 2570,-660 2610,-620 2820,-620 2850,-590 2850,-530.86 2844.14,-525 2725,-525 2700,-500 2700,-378.79 2708.79,-370 v1(2740,-370)
I2C1_SDA: pad.3@2000,-199.98 R4.2 X1.41 X4.2 X5.2 | length 7130.7
  Top Layer w15: v1(-400,-2675) -343.31,-2675 X4.2 -341.83,-2676.48 -276.08,-2676.48 R4.2 ; v1(2750,-2725) 2750.2,-2724.8 2792.72,-2724.8 X5.2 ; v1(2775,-600) 2775,-625 2800,-650 v1(2800,-675)
  Top Layer w20: pad.3@2000,-199.98 X1.41
  Bottom Layer w7: 1957.32,-557.32 1957.32,-242.68 pad.3@2000,-200
  Bottom Layer w10: v1(-400,-2675) -355.86,-2675 -350,-2680.86 -350,-2819.14 -344.14,-2825 2625,-2825 2710,-2740 2710,-2730 ; 1957.32,-557.32 2000,-600 2125,-600 2165,-640 2560,-640 2600,-600 v1(2775,-600) ; v1(2750,-2725) 2748.35,-2726.65 2713.35,-2726.65 2710,-2730 ; v1(2800,-675) 2798.19,-676.81 2798.19,-701.81 2750,-750 2750,-2600 2710,-2640 2710,-2730
I2C1_SDL: pad.3@2100,-199.98 R3.2 X1.43 X4.3 X5.3 | length 7163.1
  Top Layer w15: v1(-400,-2725) -399.61,-2724.61 X4.3 ; R3.2 2676.28,-2673.72 2748.72,-2673.72 v1(2750,-2675) 2750.2,-2675.2 2792.72,-2675.2 X5.3 ; v1(2825,-575) 2825,-633.78 2850,-658.78 v1(2850,-660)
  Top Layer w20: pad.3@2100,-200 X1.43
  Bottom Layer w7: 2057.32,-557.32 2057.32,-242.68 pad.3@2100,-200
  Bottom Layer w10: v1(-400,-2725) -400,-2825 -375,-2850 2700,-2850 2790,-2760 2790,-2690 2775,-2675 ; 2057.32,-557.32 2075,-575 2262.5,-575 2287.5,-550 2612.5,-550 2637.5,-575 v1(2825,-575) ; v1(2750,-2675) 2775,-2675 ; v1(2850,-660) 2850,-700 2775,-775 2775,-1250 2800,-1275 2800,-2500 2775,-2525 2775,-2675
OPEN1: pad.4@2000,-299.98 X1.42 | length 434.5
  Top Layer w7: pad.4@1998.5,-298.48 2042.72,-254.27 2042.72,57.34 X1.42
OPEN2: pad.4@2100,-299.98 X1.44 | length 434.5
  Top Layer w7: pad.4@2098.5,-298.48 2142.72,-254.27 2142.72,57.34 X1.44
OPEN3: pad.3@2200,-199.98 X1.45 | length 200
  Top Layer w20: pad.3@2200,-199.98 X1.45
OPEN4: pad.4@2200,-299.98 X1.46 | length 434.5
  Top Layer w7: pad.4@2198.5,-298.48 2242.72,-254.27 2242.72,57.34 X1.46
OPEN5: pad.5@2299,-400.97 X1.99 | length 635.6
  Top Layer w7: pad.5@2299,-400.98 2257.31,-359.3 2257.31,158.21 X1.99
OPEN6: pad.6@2300,-499.98 X1.100 | length 841.1
  Bottom Layer w10: X1.100 2349.16,250.02 2349.16,-450.82 pad.6@2300,-499.98
OPEN7: pad.5@2399,-400.97 X1.101 | length 635.6
  Top Layer w7: pad.5@2399,-400.98 2357.31,-359.3 2357.31,158.21 X1.101
OPEN8: pad.6@2400,-499.98 X1.102 | length 841.1
  Bottom Layer w10: X1.102 2449.16,250.02 2449.16,-450.82 pad.6@2400,-499.98
OPEN9: pad.5@2499,-400.97 X1.103 | length 635.6
  Top Layer w7: pad.5@2499,-400.98 2457.31,-359.3 2457.31,158.21 X1.103
OPEN10: pad.6@2500,-499.98 X1.104 | length 841.1
  Bottom Layer w10: X1.104 2549.16,250.02 2549.16,-450.82 pad.6@2500,-499.98
VARIOUS: pad.3@1500,-199.98 X1.31 | length 200
  Top Layer w20: pad.3@1500,-200 X1.31
VBACKUP: pad.6@2000,-499.98 X1.94 | length 835.7
  Bottom Layer w7: X1.94 2042.71,256.46 2042.71,-457.27 pad.6@2000,-499.98
VBAT: pad.5@2199,-400.97 pad.6@2200,-499.98 X1.97 X1.98 | length 834.8
  Bottom Layer w7: X1.97@2199.37,200.02 2242.73,156.66 2242.73,-357.27 pad.5@2200,-400
  Bottom Layer w20: X1.97 X1.98 ; pad.6@2200,-499.13 pad.5@2200,-400
pads on no net: X2.S1 X2.S2 X3.S1 X3.S2 X4.S1 X4.S2 X5.S1 X5.S2
copper on no net: | length 25
  Top Layer w20: 2450,-550 2450,-525

## Other copper
Bottom Layer:

## Silkscreen, mask and mechanical layers (free items; w line width, h text height)
Top Overlay:
  drawing of 33 lines, arcs and shapes, not listed
  text "JLCJLCJLCJLC" at 199.88,450.64 h60
  text "52" at 2454.34,369.65 h60
  text "2" at -25.94,368.43 h60
  text "2" at -114.42,68.99 h60
  text "52" at 2587.16,69.15 h60
  text "1" at -106.64,-30.77 h60
  text "51" at 2597.2,-30.85 h60
  text "1 / 2" at -100,-325 h60
  text "51 / 52" at 2575,-325 h60
  text "GND" at -350,-690 h60
  text "5V" at 460,-690 h60
  text "GND" at 1140,-690 h60
  text "3V3" at 1750,-690 h60
  text "GND" at 2640,-690 h60
  text "5V" at 469,-2853.2 h60
  text "GND" at 1145,-2854.54 h60
  text "3V3" at 1758.01,-2858.15 h60
  text "BreadPlate v1.0" at 353.92,-2986.28 h78.74